# EAGLE board PCB (EAGLE 9.5.2)
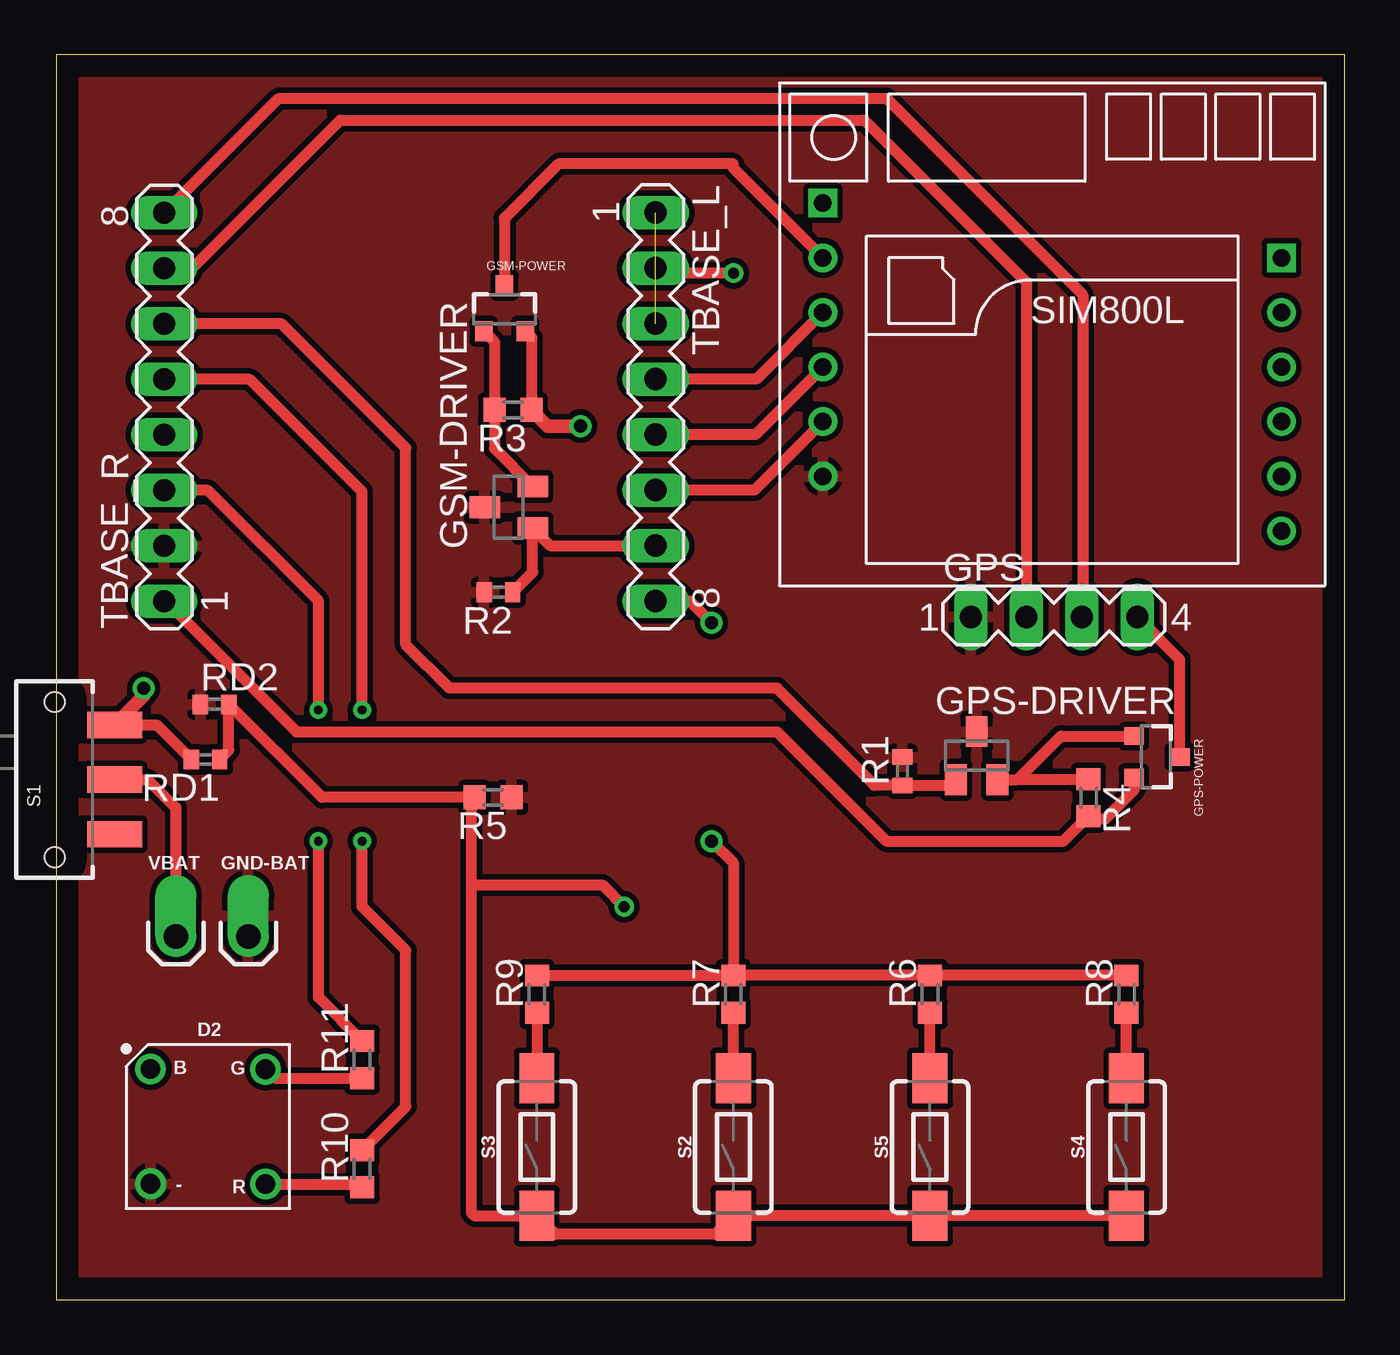
[diagram p0: board, top side]
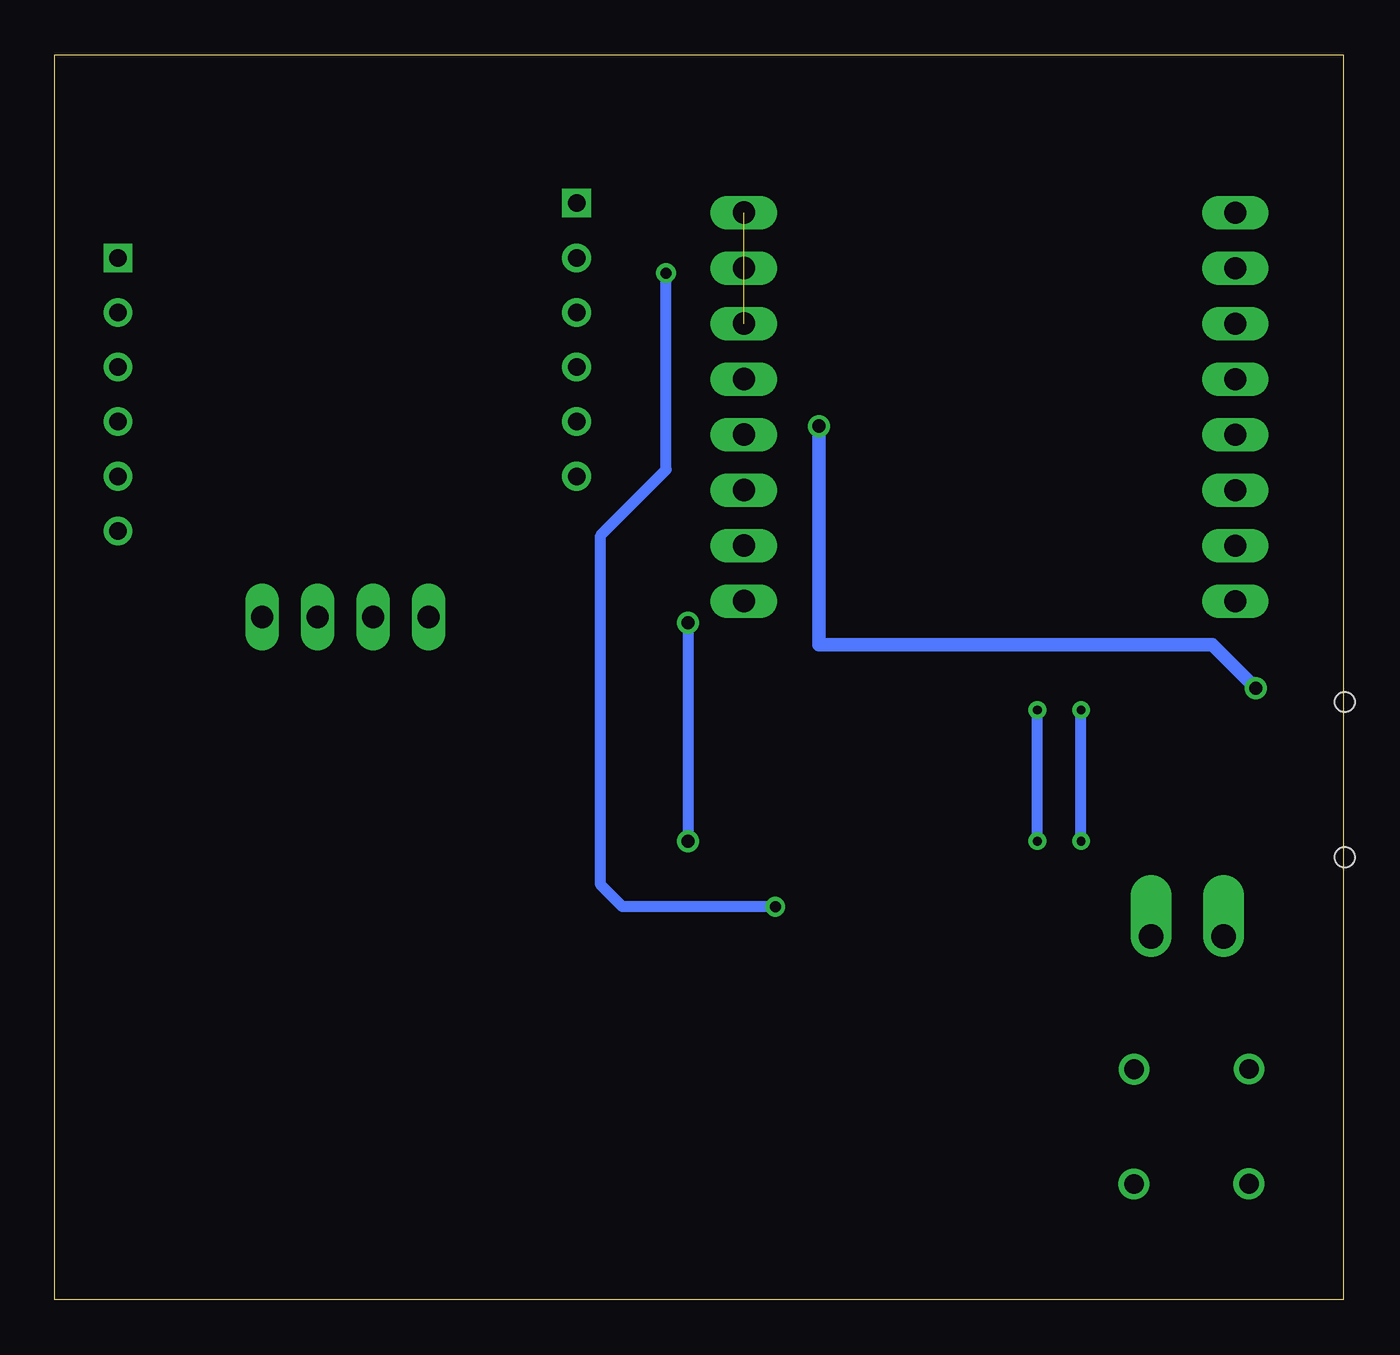
[diagram p1: board, bottom side, seen from below]

Size 59 x 57 mm. Coordinates in mm from the lower left corner, seen from the top.
Outline: 0,0 59,0 59,57 0,57 0,0
Copper layers (1*16): Top 0.035mm / dielectric 1.5mm / Bottom 0.035mm
Design rules "default": minimum track width 6mil, minimum drill 0.35mm, track to track 6mil, track to pad 6mil, pad to pad 6mil, via to via 6mil, smd to smd 6mil, copper to edge 40mil, drill to drill 6mil, minimum pad ring 10mil, minimum via ring 8mil, stop-mask expansion 4mil, vias tented up to drill 0mil, thermal gap 10mil

## Footprints (pad centres in the part's own frame; a part is rotated, then mirrored left to right if it is on the bottom)
LED_PIRANHA_5MM = drill 0.9: - -2.684,-2.684; B -2.688,2.574; G 2.575,2.562; R 2.579,-2.696
1X01_OFFSET = drill 1.118 pad 1.88 offset: 1 0,0
MA04-1 = drill 1.016 long: 1 -3.81,0; 2 -1.27,0; 3 1.27,0; 4 3.81,0
SOT23 = smd 1 x 1.4: 1 -0.95,-1.1; 2 0.95,-1.1; 3 0,1.1
SOT23-3 = smd 0.8 x 0.9: 1 -0.95,-1; 2 0.95,-1; 3 0,1.1
R0402 = smd 0.7 x 0.9: 1 -0.65,0; 2 0.65,0
R0603 = smd 1 x 1.1: 1 -0.85,0; 2 0.85,0
SWITCH_SPDT_SMD = smd 1.2 x 2.5: 1 -2.5,-2.75; 2 0,-2.75; 3 2.5,-2.75 | hole 0.9: -3.55,0; 3.55,0
TACTILE_SWITCH_SMD_6.0X3.5MM = smd 2.3 x 1.6: 1 -3.15,0; 2 3.15,0
MA08-1 = drill 1.016 long: 1 -8.89,0; 2 -6.35,0; 3 -3.81,0; 4 -1.27,0; 5 1.27,0; 6 3.81,0; 7 6.35,0; 8 8.89,0
SIM800LMODULE = drill 0.8: DTR 10.5,1; GND -10.5,-6.5; MIC+ 10.5,-1.5; MIC- 10.5,-4; RST -10.5,1; RX -10.5,-1.5; SPK+ 10.5,-6.5; SPK- 10.5,-9; TX -10.5,-4; VCC -10.5,3.5 | drill 0.8 square: NET -10.5,6; RING 10.5,3.5

## Placement (x,y rotation side)
D2  [LED_PIRANHA_5MM]  7,8 0 top
GND-BAT  [1X01_OFFSET]  8.79,16.64 0 top
GPS  [MA04-1]  45.68,31.26 0 top
GPS-DRIVER  [SOT23]  42.14,24.91 0 top
GPS-POWER  MOSFET-PCHANNEL  [SOT23-3]  50.34,24.86 270 top
GSM-DRIVER  [SOT23]  20.71,36.28 90 top
GSM-POWER  MOSFET-PCHANNEL  [SOT23-3]  20.52,45.34 0 top
R1  1k  [R0402]  38.74,24.2 90 top
R2  1k  [R0402]  20.24,32.39 180 top
R3  10k  [R0603]  20.91,40.74 180 top
R4  10k  [R0603]  47.26,22.99 270 top
R5  1k  [R0603]  20,23 180 top
R6  330  [R0603]  40,14 90 top
R7  220  [R0603]  31,14 90 top
R8  470  [R0603]  49,14 90 top
R9  100  [R0603]  22,14 90 top
R10  100  [R0603]  14,6 90 top
R11  100  [R0603]  14,11 90 top
RD1  82k  [R0402]  6.83,24.74 180 top
RD2  120k  [R0402]  7.25,27.26 0 top
S1  [SWITCH_SPDT_SMD]  -0.08,23.82 90 top
S2  MOMENTARY-SWITCH-SPST-SMD-6.0X3.5MM  [TACTILE_SWITCH_SMD_6.0X3.5MM]  31,7 90 top
S3  MOMENTARY-SWITCH-SPST-SMD-6.0X3.5MM  [TACTILE_SWITCH_SMD_6.0X3.5MM]  22,7 90 top
S4  MOMENTARY-SWITCH-SPST-SMD-6.0X3.5MM  [TACTILE_SWITCH_SMD_6.0X3.5MM]  49,7 90 top
S5  MOMENTARY-SWITCH-SPST-SMD-6.0X3.5MM  [TACTILE_SWITCH_SMD_6.0X3.5MM]  40,7 90 top
TBASE_L  [MA08-1]  27.44,40.88 270 top
TBASE_R  [MA08-1]  4.94,40.87 90 top
U$1  SIM800LMODULE  [SIM800LMODULE]  45.6,44.2 0 top
VBAT  [1X01_OFFSET]  5.47,16.64 0 top

## Library data of the parts
D2 = SparkFun-LED; SF_ID: COM-11679
GND-BAT VBAT = SparkFun-Connectors
GPS TBASE_L TBASE_R = con-lstb; OC_FARNELL: unknown; OC_NEWARK: unknown
GPS-DRIVER GSM-DRIVER = semicon-smd-ipc
GPS-POWER GSM-POWER = User-Submitted; PROD_ID: TRANS-08285
R1-R11 RD1 RD2 = eagle-ltspice; SPICEMODEL: NONE; SPICEPREFIX: R
S1 = SparkFun-Retired
S2-S5 = SparkFun-Switches; PROD_ID: SWCH-14278; SF_SKU: COM-08229
U$1 = SIM800LMODULE

## Nets
0/FLASH: TBASE_R.4
2/TXD1: R11.2 TBASE_R.3
3.3V: R6.2 R7.2 R8.2 R9.2 TBASE_L.8
4/SDA: R10.2 TBASE_R.5
5/SCL: GPS-DRIVER.1 R1.1 TBASE_R.6
5V: GPS-POWER.2 R4.2 TBASE_R.1
A0: R5.2 RD1.1 RD2.2 S2.1 S3.1 S4.1 S5.1 TBASE_L.2
CS/TXD2: GSM-DRIVER.1 R2.1 TBASE_L.7
GND: D2.- GND-BAT.1 GPS-DRIVER.3 GPS.1 GSM-DRIVER.3 R1.2 R2.2 R5.1 RD2.1 TBASE_R.2 U$1.GND
GPS-VCC: GPS-POWER.3 GPS.4
MISO: TBASE_L.5 U$1.RX
MOSI/RXD2: TBASE_L.6 U$1.TX
N$1: S1.2 VBAT.1
N$2: GPS-DRIVER.2 GPS-POWER.1 R4.1
N$3: GSM-POWER.2 R3.1 RD1.2 S1.3
N$4: GSM-POWER.3 U$1.VCC
N$5: GSM-DRIVER.2 GSM-POWER.1 R3.2
N$6: R8.1 S4.2
N$7: R6.1 S5.2
N$8: R7.1 S2.2
N$9: R9.1 S3.2
N$10: D2.R R10.1
N$11: D2.G R11.1
RST: TBASE_L.1 TBASE_L.3
RXD: GPS.2 TBASE_R.7
SCLK: TBASE_L.4 U$1.RST
TXD: GPS.3 TBASE_R.8

## Tracks (layer width: path | path; a pad name or v marks a point on that pad's centre or on a via)
2/TXD1  (via drill 0.4)
  Top 0.508: R11.2 12,13.85 v12,21 | TBASE_R.3 6.94,37.06 12,32 v12,27
  Bottom 0.508: v12,21 v12,27
3.3V  (via drill 0.6)
  Top 0.508: R9.2 R7.2 | R7.2 R6.2 R8.2 | TBASE_L.8 29.01,31.99 v30,31 | v30,21 31,20 R7.2
  Bottom 0.508: v30,31 v30,21
4/SDA  (via drill 0.4)
  Top 0.508: R10.2 16,8.85 16,16 14,18 v14,21 | TBASE_R.5 8.86,42.14 14,37 v14,27
  Bottom 0.508: v14,21 v14,27
5/SCL
  Top 0.508: GPS-DRIVER.1 40.93,23.55 R1.1 37.45,23.55 33,28 18,28 16,30 16,39 10.32,44.68 TBASE_R.6
5V
  Top 0.508: TBASE_R.1 5.02,31.98 11,26 33,26 38,21 46.12,21 R4.2 47.4,22 48,22 49.34,23.34 GPS-POWER.2
A0  (via drill 0.5)
  Top 0.508: RD1.1 7.9,25.16 RD2.2 12.16,23 R5.2 19,22.85 19,19 | 19,19 19,4 19.15,3.85 S3.1 22.85,3 30.15,3 S2.1 S5.1 S4.1 | 19,19 25,19 v26,18 | v31,47 27.67,47 TBASE_L.2
  Bottom 0.508: v26,18 33,18 34,19 34,35 31,38 v31,47
CS/TXD2
  Top 0.508: TBASE_L.7 22.61,34.53 GSM-DRIVER.1 21.81,33.31 R2.1
GND
  pour Top (isolate 0.254): 0,57 59,57 59,0 0,0
GPS-VCC
  Top 0.508: GPS-POWER.3 51.44,29.31 GPS.4
MISO
  Top 0.508: U$1.RX 32.01,39.61 TBASE_L.5
MOSI/RXD2
  Top 0.508: U$1.TX 31.97,37.07 TBASE_L.6
N$1
  Top 0.508: S1.2 4.18,23.82 5.47,22.53 VBAT.1
N$2
  Top 0.508: GPS-DRIVER.2 44,23.81 | 44,23.81 46,25.81 GPS-POWER.1 | R4.1 47.23,23.81 44,23.81
N$3  (via drill 0.6)
  Top 0.508: GSM-POWER.2 21.76,44.05 R3.1 | S1.3 4.6,26.32 RD1.2
  Top 0.61: S1.3 4,27.65 v4,28 | v24,40 22.5,40 R3.1
  Bottom 0.61: v4,28 6,30 24,30 v24,40
N$4
  Top 0.508: U$1.VCC 31,51.8 31,52 23,52 20.52,49.52 GSM-POWER.3
N$5
  Top 0.508: GSM-POWER.1 20.06,43.85 R3.2 20.06,38.98 GSM-DRIVER.2
N$6
  Top 0.508: S4.2 R8.1
N$7
  Top 0.508: S5.2 R6.1
N$8
  Top 0.508: S2.2 R7.1
N$9
  Top 0.508: R9.1 S3.2
N$10
  Top 0.508: D2.R 13.85,5.3 R10.1
N$11
  Top 0.508: D2.G 9.99,10.15 R11.1
RST  (1 unrouted)
RXD
  Top 0.508: TBASE_R.7 6.22,47.22 13,54 37,54 44.41,46.59 GPS.2
SCLK
  Top 0.508: U$1.RST 32.05,42.15 TBASE_L.4
TXD
  Top 0.508: TBASE_R.8 10.18,55 38,55 47,46 47,31.31 GPS.3